# Altium PCB mbed_programmer.PcbDoc
Units mm, origin at the board's own origin, x right, y up, seen from the top; angles counter-clockwise.
Board outline 42 x 26.5 mm, 2 copper layers (Top Layer, Bottom Layer); 32 components, 46 nets, 153 pads, 95 vias.
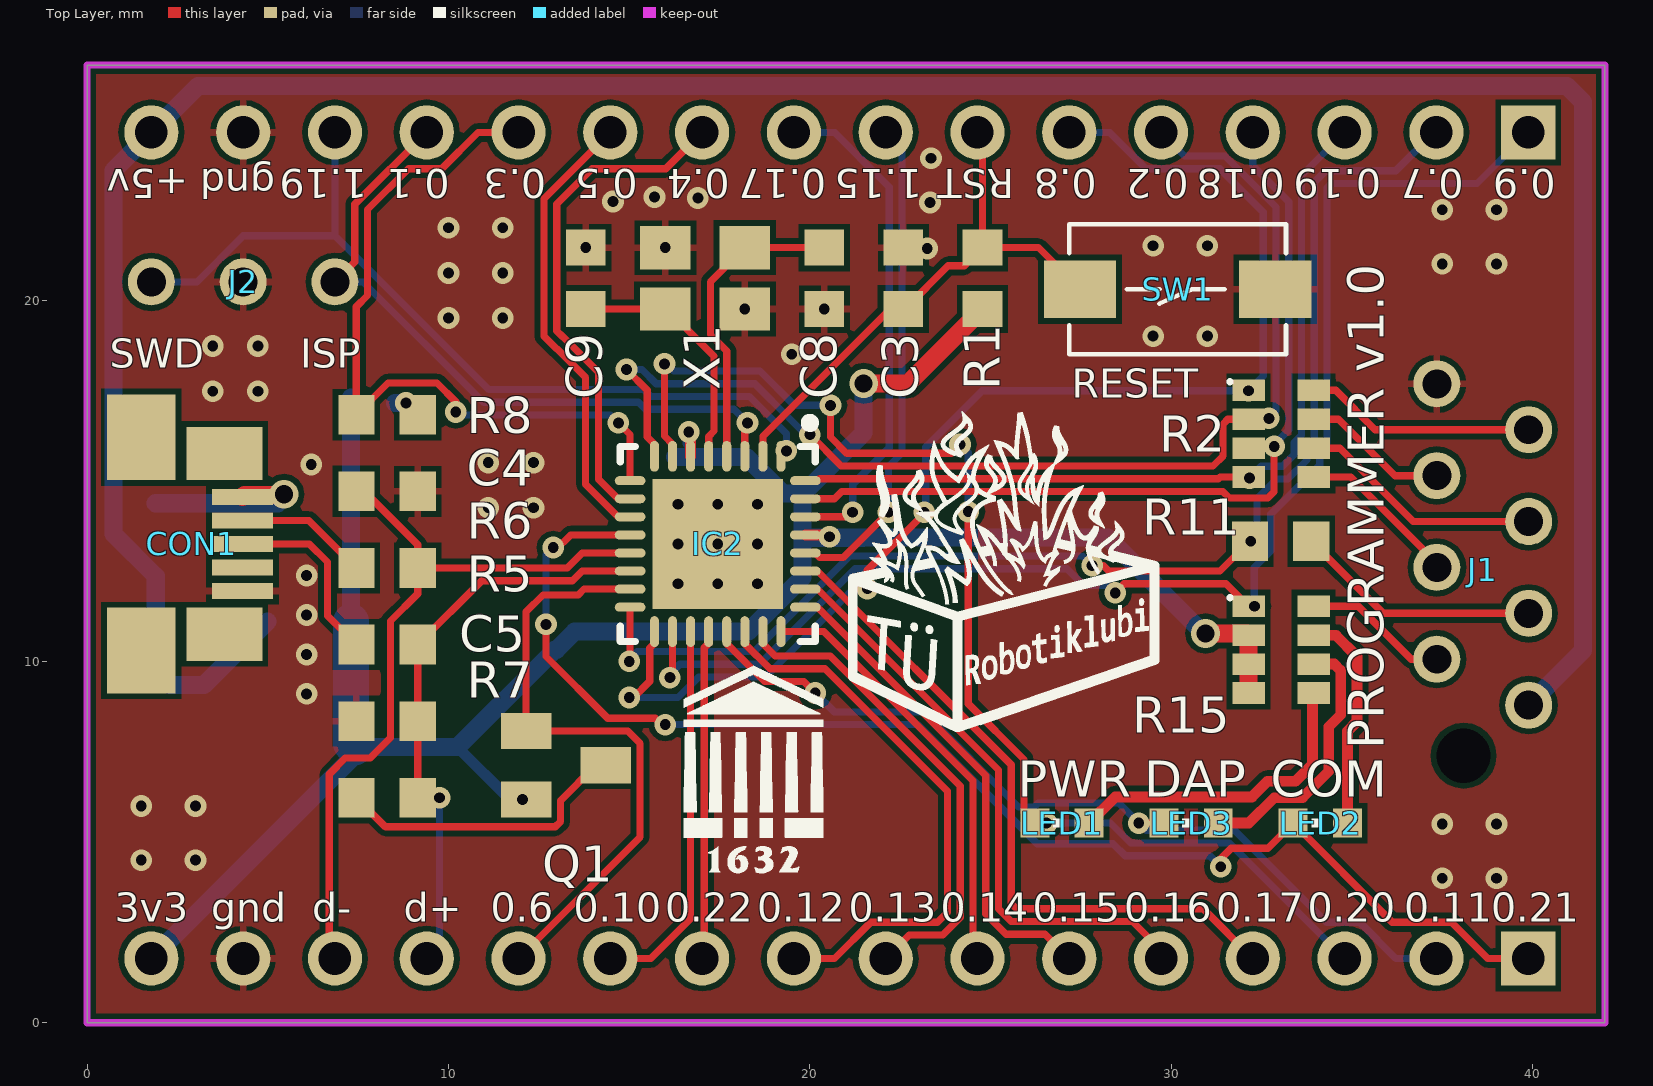
[diagram p0: Top Layer view]
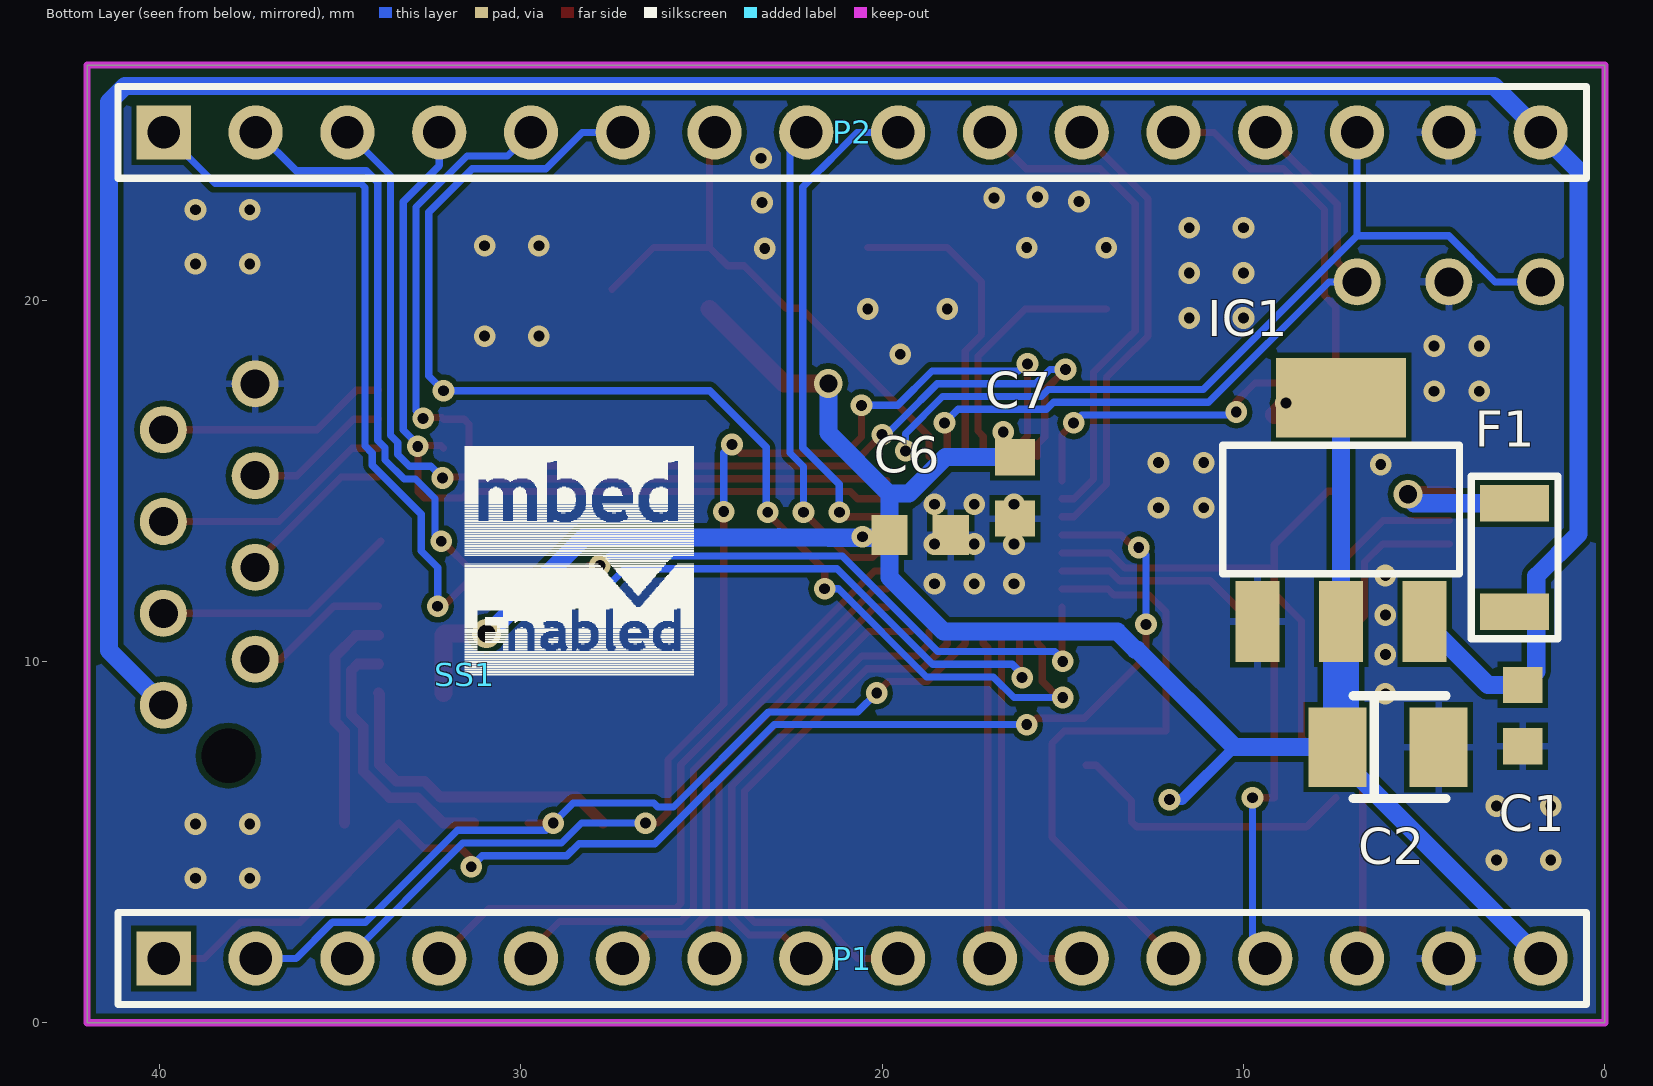
[diagram p1: Bottom Layer view, seen from below]

## Layer stack, top to bottom
Top Solder: solder mask 0.0102, Solder Resist, Dk 3.5
Top Layer: signal copper 0.0356
Dielectric1: dielectric 0.32, FR-4, Dk 4.8
Bottom Layer: signal copper 0.0356
Bottom Solder: solder mask 0.0102, Solder Resist, Dk 3.5

## Board outline
0,0 0,26.5 42,26.5 42,0

## Design rules (kind name [scope] priority, off if disabled: settings)
BoardOutlineClearance [All] p1: gap=0.2
Clearance [All] p1: gap=0.153
ComponentClearance [All] p1: gap=0.1 collisioncheckmode=3 verticalgap=0.1 showdistances=FALSE
FabricationTestPointUsage TestPointUsage [All] p1: valid=0 allowmultiple=FALSE
FabricationTestpoint Testpoint [All] p1: side=3 testpointundercomponent=TRUE minsize=1.016 maxsize=2.54 preferedsize=1.524 minholesize=0 maxholesize=1.016 preferedholesize=0.813 testpointgrid=0.025 allowsidetop=TRUE allowsidebottom=TRUE usegrid=TRUE gridtolerance=0
HoleSize [All] p1: absolutevalues=TRUE maxlimit=2.54 minlimit=0.3 maxpercent=80.000 minpercent=20.000
MinimumAnnularRing [All] p1: minimumring=0.15
PlaneConnect [All] p1: planeconnectstyle=Relief reliefexpansion=0.2 reliefentries=4 reliefconductorwidth=0.2 reliefairgap=0.15
PolygonConnect PolygonConnect_Vias [All vs IsVia] p1: connectstyle=Direct reliefconductorwidth=0.254 reliefentries=4 polygonreliefangle="90 Angle" airgapwidth=0.254
PolygonConnect [All] p2: connectstyle=Relief reliefconductorwidth=0.2 reliefentries=4 polygonreliefangle="90 Angle" airgapwidth=0.15
RoutingVias [All] p1: holewidth=0.4 width=0.7 viastyle="Through Hole" minholewidth=0.3 minwidth=0.6 maxholewidth=6.3 maxwidth=1.5
SilkToSilkClearance [All] p1: silktosilkclearance=0.2
SilkToSolderMaskClearance SilkscreenOverComponentPads [IsPad] p1: minsilkscreentomaskgap=0.254 clearancetoexposedcopper=TRUE
SolderMaskExpansion [All] p1: expansion=0.075
Width [All] p1: maxlimit=1 minlimit=0.152 preferedwidth=0.2 minimp=50.000000 maximp=50.000000 favimp=50.000000
23 further rules are at their usual default settings.

## Components (designator, comment, footprint, x,y, rotation, side; value= is the part's Value field where it differs from the comment)
C1 "100nF" 0603 2.275,8.5 r270 bottom
C2 "10uF" CASE-B 6,7.625 r180 bottom
C3 "100nF" 0603 22.587,20.6 r90 top
C4 "18pF" 0603 8.3,14.705 r0 top
C5 "18pF" 0603 8.3,8.345 r180 top
C6 "100nF" 0603 18.95,13.5 r180 bottom
C7 "100nF" 0603 16.325,14.8 r270 bottom
C8 "18pF" 0603 20.4,20.6 r270 top
C9 "18pF" 0603 13.8,20.6 r90 top
CON1 "USB Connectors" MOLEX-47364-0001 1.5,13.25 r0 top
F1 "PTC-1206" PTC-1206 2.5,12.875 r270 bottom
IC1 "LD1117S33" SOT223 7.3,14.201 r180 bottom
IC2 "IF-LPC11U35" QFN50P500X500X85_HS-33N 17.45,13.25 r270 top
J1 "HEADER-8" MICRO-MATCH-8 39.89,8.79 r270 top
J2 "HEADER-3" PIN-HEADER-3 6.858,20.5 r180 top
LED1 "PWR" CHIPLED_0603 26.975,5.525 r90 top
LED2 "COM" CHIPLED_0603 34.125,5.525 r90 top
LED3 "DAP" CHIPLED_0603 30.55,5.525 r90 top
P1 "Header 16" HDR1X16 39.878,1.778 r180 bottom
P2 "Header 16" HDR1X16 39.878,24.638 r180 bottom
Q1 "BSS84" SOT23 13.25,7.125 r270 top
R1 "10k" 0603 24.775,20.6 r270 top
R2 "470R" CAC-80P319X159-8N 33.039,16.3 r0 top
R5 "33R" 0603 8.3,10.465 r0 top
R6 "33R" 0603 8.3,12.585 r0 top
R7 "1k5" 0603 8.3,6.225 r0 top
R8 "10k" 0603 8.3,16.825 r0 top
R11 "470R" 0603 33.025,13.325 r180 top
R15 "470R" CAC-80P319X159-8N 33.039,10.325 r0 top
SS1 "MBED-ENABLED-LOGOSMALL" MBED-ENABLED-LOGO-250X250-MIL 31.55,9.625 r180 bottom
SW1 "RESET" DTSM-32S-B 30.175,20.3 r180 top
X1 "ABM8G" XTAL-3.2x2.5 17.1,20.6 r180 top

## Footprints (in the part's own frame and the unit in brackets; to place one, negate y for a bottom-side part, rotate by r counter-clockwise, add the part's x,y. Pads: shape width x height; smd on the part's side, far side on the other; paste and mask are expansions set on the pad)
0603 [mm]
  rect 1x1.1 smd: 1(-0.85,0) 2(0.85,0)
CAC-80P319X159-8N [mm] "Chip Array, ConvexE, 8-Leads, Pitch 0,80mm,  Body 3,20x1,60mm,  IPC Medium Density"
  rect 0.9x0.6 smd: 1(-0.9,1.2) 2(-0.9,0.4) 3(-0.9,-0.4) 4(-0.9,-1.2) 5(0.9,-1.2) 6(0.9,-0.4) 7(0.9,0.4) 8(0.9,1.2)
  silkscreen extent -1.46,1.39 -1.36,1.49, body extent -0.92,-1.68 0.92,1.68, height 0.7
CASE-B [mm]
  rect 1.6x2.2 smd: 1(-1.4,0) 2(1.4,0)
  silkscreen extent -0.96,-1.42 1.6,1.42
CHIPLED_0603 [mil]
  rect 31.5x31.5 smd: A(0,-29.53) C(0,29.53)
  silkscreen extent -5,0 5,10
DTSM-32S-B [mm]
  rect 2x1.6 smd: P$1(-2.7,0) P$2(2.7,0)
  silkscreen extent -3,-1.8 3,1.8
HDR1X16 [mm] "Connector; Header; 16 Position"
  rect 1.5x1.5 hole 0.9: 1(0,0)
  round 1.5 hole 0.9: 2(2.54,0) 3(5.08,0) 4(7.62,0) 5(10.16,0) 6(12.7,0) 7(15.24,0) 8(17.78,0) 9(20.32,0) 10(22.86,0) 11(25.4,0) 12(27.94,0) 13(30.48,0) 14(33.02,0) 15(35.56,0) 16(38.1,0)
  silkscreen extent -1.27,-1.27 39.37,1.27
MBED-ENABLED-LOGO-250X250-MIL [mm]
  silkscreen extent -0.01,-0.01 6.34,6.34
MICRO-MATCH-8 [mm]
  round 1.3 hole 0.8: 1(0,0) 2(-1.27,-2.54) 3(-2.54,0) 4(-3.81,-2.54) 5(-5.08,0) 6(-6.35,-2.54) 7(-7.62,0) 8(-8.89,-2.54)
  round 0 hole 1.5 unplated: drill(1.4,-1.8)
  body extent -10.49,-3.77 1.6,1.23, height 4
MOLEX-47364-0001 [mm]
  rect 1.7x0.45 smd: 4(2.8,-0.65) D+(2.8,0) D-(2.8,0.65) GND(2.8,-1.3) VBUS(2.8,1.3)
  rect 1.9x2.375 smd: GND1(0,2.95) GND4(0,-2.95)
  rect 2.1x1.475 smd: GND2(2.3,2.5) GND3(2.3,-2.5)
  body extent -2.78,-3.99 2.65,3.99, height 2.72
PIN-HEADER-3 [mm]
  round 1.3 hole 0.8: 1(0,0) 2(2.54,0) 3(5.08,0)
PTC-1206 [mm]
  rect 1x1.9 smd: 1(-1.5,0) 2(1.5,0)
  silkscreen extent -2.25,-1.2 2.25,1.2
QFN50P500X500X85_HS-33N [mm] "QFN, 32-Leads, Body 5,00x5,00mm, Pitch 0,50mm, Thermal Pad 3,60x3,60mm, IPC Medium Density"
  oval 0.85x0.25 smd: 1(-2.425,1.75) 2(-2.425,1.25) 3(-2.425,0.75) 4(-2.425,0.25) 5(-2.425,-0.25) 6(-2.425,-0.75) 7(-2.425,-1.25) 8(-2.425,-1.75) 17(2.425,-1.75) 18(2.425,-1.25) 19(2.425,-0.75) 20(2.425,-0.25) 21(2.425,0.25) 22(2.425,0.75) 23(2.425,1.25) 24(2.425,1.75)
  oval 0.25x0.85 smd: 9(-1.75,-2.425) 10(-1.25,-2.425) 11(-0.75,-2.425) 12(-0.25,-2.425) 13(0.25,-2.425) 14(0.75,-2.425) 15(1.25,-2.425) 16(1.75,-2.425) 25(1.75,2.425) 26(1.25,2.425) 27(0.75,2.425) 28(0.25,2.425) 29(-0.25,2.425) 30(-0.75,2.425) 31(-1.25,2.425) 32(-1.75,2.425)
  rect 3.6x3.6 smd: EXP(0,0)
  silkscreen extent -3.47,-2.7 2.7,2.7, body extent -2.6,-2.6 2.6,2.6, height 0.85
SOT23 [mm]
  rect 1x1.4 smd: 1(-0.95,-1.1) 2(0.95,-1.1) 3(0,1.1)
SOT223 [mil]
  rect 48x88 smd: 1(-91,-122) 2(0,-122) 3(91,-122)
  rect 141.73x86.61 smd: 4(0,122.01)
  silkscreen extent -129,-70 129,70
XTAL-3.2x2.5 [mm] "3.2mm x 2.5mm SMD Crystal Oscillator"
  rect 1.4x1.2 smd: 0(-1.1,-0.85) 1(1.1,-0.85) 2(1.1,0.85) 3(-1.1,0.85)
  body extent -1.6,-1.25 1.6,1.25, height 1

## Part data
C1 C3 C4 C5 C6 C7 C8 C9: library part C0603
C2: library part C-POLB
CON1: library part USB_MICROB
LED1 LED2 LED3: library part LED0603
P1 P2: "Header, 16-Pin"
R1 R5 R6 R7 R8 R11: library part R0603
R2 R15: library part 0603x4_resistor_array
SW1: library part SPST

## Via types
v1: diameter 0.6, hole 0.3, Top Layer to Bottom Layer, 92 vias
v2: diameter 0.8, hole 0.5, Top Layer to Bottom Layer, 3 vias

## Nets (pads, with @x,y where several pads share a name; then routed paths per layer and width w, separated by ;. In a path a pad name is that pad's centre, name@x,y a point inside that pad or via, vN(x,y) a via of type N, cw(c..) or ccw(c..) an arc to the next point about the centre after c; other vN are vias at no path point)
+3.3V_IF: C2.1 C6.1 C7.1 IC1.2 IC1.4 IC2.6 IC2.29 P1.16 Q1.2 R1.2 R8.2 R15.2 R15.3 R15.4 | length 66.8
  Top Layer w0.3: v1(12.05,6.175) Q1.2 ; v1(16.647,16.345) 16.7,16.292 IC2.6 ; IC2.29 20.492,13.5 v1(20.545,13.447)
  Top Layer w0.5: v1(8.825,17.15) R8.2 ; v2(21.49,17.695) 22.72,17.695 R1.2 ; v2(30.95,10.775) 32.089,10.775 R15.2 R15.3 R15.4
  Bottom Layer w0.3: 10.25,7.625 11.7,6.175 v1(12.05,6.175) ; C7.1@16.628,16.025 16.628,16.326 v1(16.647,16.345) ; v1@20.3,13.525 20.378,13.447 v1(20.545,13.447)
  Bottom Layer w0.5: P1.16 7.4,7.4 C2.1 10.25,7.625 12.947,10.322 12.991,10.322 13.494,10.825 18.3,10.825 19.8,12.325 C6.1 ; IC1.2 IC1.4 ; IC1.4@8.525,17.15 v1(8.825,17.15) ; C7.1@16.275,15.65 18.244,15.65 19.253,14.641 19.816,14.641 ; 21.476,13.422 20.772,13.422 19.878,13.422 C6.1 ; 21.476,13.423 22.845,13.423 22.859,13.437 22.874,13.423 28.252,13.423 30.925,10.75 v2(30.95,10.775) ; v2(21.49,17.695) 21.49,16.315 19.816,14.641 ; C6.1 19.8,14.625 19.816,14.641
  Bottom Layer w1: IC1.2 7.3,7.725 C2.1
AD1: IC2.22 P1.9 | length 15.8
  Top Layer w0.2: IC2.22 18.2,10.49 18.896,9.794 20.42,9.794 23.807,6.407 23.807,3.057 23.531,2.781 21.683,2.781 20.68,1.778 P1.9
AD2: IC2.23 P1.8 | length 13.6
  Top Layer w0.2: IC2.23 18.7,10.49 19.043,10.147 20.566,10.147 24.16,6.553 24.16,2.911 23.677,2.428 22.748,2.428 P1.8
AD3: IC2.24 P1.7 | length 12
  Top Layer w0.2: IC2.24 20.387,10.825 24.513,6.699 24.513,1.903 P1.7
AD4: IC2.25 P1.6 | length 13.6
  Top Layer w0.2: IC2.25 20.211,11.5 24.866,6.845 24.866,3.009 25.428,2.447 26.509,2.447 P1.6
AD5: IC2.26 P1.5 | length 16.5
  Top Layer w0.2: IC2.26 20.21,12 25.219,6.992 25.219,3.155 25.574,2.8 28.925,2.8 29.718,2.007 P1.5
AD6: IC2.20 P1.10 | length 9.2
  Top Layer w0.2: P1.10 17.078,1.778 17.078,10.378 17.2,10.5 IC2.20
AD7: IC2.27 P1.4 | length 19.1
  Top Layer w0.2: IC2.27 20.21,12.5 25.572,7.138 25.572,3.302 25.72,3.153 30.883,3.153 P1.4
D+: CON1.D+ R5.1 | length 5.2
  Top Layer w0.2: CON1.D+ 4.303,13.247 6.147,13.247 6.15,13.25 6.65,12.75 6.65,11.265 R5.1
D-: CON1.D- R6.1 | length 3.7
  Top Layer w0.2: CON1.D- 6.135,13.9 R6.1
DCD: IC2.28 P2.8 | length 13.7
  Top Layer w0.2: IC2.28 20.148,13 20.27,12.878 20.927,12.878 v1(22.175,14.126)
  Bottom Layer w0.2: P2.8 22.548,24.188 22.548,15.768 22.175,15.395 v1(22.175,14.126)
GND: C1.2 C2.2 C3.2 C4.2 C5.2 C6.2 C7.2 C8.2 C9.2 CON1.GND IC1.1 IC2.EXP J1.8 J2.2 P1.15 P2.15 SW1.P$1 X1.1 X1.3
  other v1: 37.5,4 39,4 1.5,4.5 3,4.5 37.5,5.5 39,5.5 1.5,6 3,6 6.075,9.1 6.075,10.192 6.075,11.283 16.35,12.15 17.45,12.15 18.55,12.15 6.075,12.375 16.35,13.25 17.45,13.25 18.55,13.25 11.1,14.25 12.35,14.25 16.35,14.35 17.45,14.35 18.55,14.35 6.2,15.45 11.1,15.5 12.35,15.5 3.475,17.475 4.725,17.475 19.5,18.5 3.475,18.725 4.725,18.725 29.5,19 31,19 10,19.5 11.5,19.5 18.2,19.75 20.4,19.75 10,20.75 11.5,20.75 37.5,21 39,21 23.25,21.425 13.8,21.45 16,21.45 29.5,21.5 31,21.5 10,22 11.5,22 37.5,22.5 39,22.5 23.325,22.7 14.55,22.725 16.9,22.825 15.7,22.85 23.35,23.925
HID: IC2.12 LED2.C P1.1 | length 37.4
  Top Layer w0.2: v1(12.7,11.025) 12.7,10.135 14.407,8.428 15.723,8.428 16,8.151 v1(16,8.25) ; v1(12.901,13.151) 12.901,13.118 12.95,13.068 13.382,13.5 IC2.12 ; v1(31.369,4.318) 31.369,4.537 31.658,4.826 32.676,4.826 LED2.C 36.119,2.781 37.753,2.781 38.756,1.778 P1.1
  Bottom Layer w0.2: v1(12.7,11.025) 12.7,12.95 v1(12.901,13.151) ; v1(16,8.25) 22.992,8.25 26.289,4.953 28.391,4.953 28.725,4.619 31.068,4.619 v1(31.369,4.318)
MSD: IC2.7 LED1.C P1.3 | length 34
  Top Layer w0.2: v1(15.975,18.234) 15.975,16.235 16.2,16.01 IC2.7 ; v1(20.57,17.085) 20.57,16.206 21.014,15.762 23.917,15.762 v1(24.155,16) ; v1(24.385,14.145) 24.384,14.144 24.384,8.825 25.925,7.284 25.925,5.825 LED1.C v1(26.55,5.525)
  Bottom Layer w0.2: v1(15.975,18.234) 16.003,18.262 16.231,18.034 18.622,18.034 19.57,17.085 v1(20.57,17.085) ; v1(24.155,16) 24.384,15.771 v1(24.385,14.145) v1(24.385,14.145) ; v1(26.55,5.525) 28.318,5.525 28.871,4.972 31.604,4.972 P1.3
NetC8_1: C8.1 IC2.4 X1.0 | length 8.6
  Top Layer w0.2: IC2.4 17.7,18.592 17.247,19.045 17.247,20.497 X1.0 C8.1
NetC9_1: C9.1 IC2.5 X1.2 | length 6.9
  Top Layer w0.2: C9.1 16.043,19.75 17.347,18.446 17.347,16.372 17.2,16.225 IC2.5
NetCON1_VBUS: CON1.VBUS F1.1 | length 4.9
  Top Layer w0.5: CON1.VBUS 4.36,14.61 5.434,14.61 v2(5.45,14.626)
  Bottom Layer w0.5: F1.1@1.9,14.375 F1.1 5.276,14.375 5.45,14.55 v2(5.45,14.626)
NetLED1_A: LED1.A R15.5 | length 8.8
  Top Layer w0.3: LED1.A 28.45,6.25 32.231,6.25 32.662,6.681 33.44,6.681 33.907,7.148 33.907,9.093 R15.5
NetLED2_A: LED2.A R15.7 | length 6.2
  Top Layer w0.3: R15.7 34.555,10.725 35.145,10.135 35.145,8.334 34.875,8.064 LED2.A
NetLED3_A: LED3.A R15.6 | length 7.4
  Top Layer w0.3: LED3.A 32.146,5.525 32.849,6.228 33.628,6.228 34.36,6.96 34.36,8.19 34.692,8.522 34.692,9.743 34.51,9.925 R15.6
NetQ1_3: Q1.3 R7.1 | length 8.3
  Top Layer w0.2: R7.1 8.253,5.422 9.755,5.422 9.758,5.425 11.342,5.425 11.345,5.422 12.955,5.422 13.103,5.57 13.103,6.153 14.075,7.125 Q1.3
RESET: C3.1 IC2.2 P2.7 R1.1 SW1.P$2 | length 15.2
  Top Layer w0.2: IC2.2 18.7,16.231 22.244,19.775 22.65,19.775 23.825,20.95 24.275,20.95 R1.1 ; P2.7 24.775,24.501 R1.1 ; SW1.P$2 26.325,21.45 R1.1
RTS: IC2.30 P2.9 | length 14.1
  Top Layer w0.2: IC2.30 21.059,14 v1(21.184,14.126)
  Bottom Layer w0.2: P2.9 20.687,24.638 21.095,24.23 21.095,24.223 21.683,23.635 21.69,23.635 22.195,23.13 22.195,15.914 21.184,14.904 v1(21.184,14.126)
SCK0: IC2.19 P1.11 | length 10.6
  Top Layer w0.2: P1.11 15.6,1.778 16.7,2.878 IC2.19
SCL: IC2.10 P2.10 | length 14
  Top Layer w0.2: IC2.10 14.69,14.5 14.148,15.043 14.148,18.002 13.153,18.997 13.145,18.997 12.997,19.145 12.997,22.658 13.974,23.635 16.015,23.635 P2.10
SDA: IC2.11 P2.11 | length 13.1
  Top Layer w0.2: P2.11@14.478,24.153 P2.11 12.644,22.804 12.644,18.999 12.999,18.644 13.007,18.644 13.795,17.856 13.795,14.896 14.69,14 IC2.11
SWDAP: IC2.1 J2.3 P2.14 | length 23.9
  Top Layer w0.2: IC2.1 v1(19.35,15.825)
  Bottom Layer w0.2: J2.3 3.041,20.5 4.318,21.777 6.858,21.777 ; P2.14 6.858,21.777 ; v1(19.35,15.825) 19.35,16.307 18.329,17.328 15.6,17.328 15.406,17.522 11.113,17.522 6.858,21.777
TGT_NRESET: IC2.8 P2.5 R2.2 | length 32.7
  Top Layer w0.2: v1(14.925,18.075) 15.5,17.5 15.5,16.21 15.7,16.01 IC2.8 ; v1(20.001,16.276) 20.868,15.409 31.159,15.409 31.436,15.686 31.436,16.571 31.565,16.7 R2.2 32.188,16.749 32.725,16.749 v1(32.702,16.726)
  Bottom Layer w0.2: v1(14.925,18.075) 15.352,18.075 15.746,17.681 18.475,17.681 19.424,16.732 19.738,16.418 19.88,16.276 v1(20.001,16.276) ; P2.5 30.368,23.988 31.49,23.988 32.902,22.576 32.902,16.926 v1(32.702,16.726)
TGT_NRESET1: J1.6 R2.7 | length 4.1
  Top Layer w0.2: R2.7 34.63,16.7 36.19,15.14 J1.6
TGT_RX: IC2.32 P2.3 R2.4 | length 23.3
  Top Layer w0.2: IC2.32 20.21,15 20.266,15.056 31.305,15.056 31.349,15.1 R2.4 v1(32.164,15.075)
  Bottom Layer w0.2: v1(32.164,15.075) 32.487,15.398 33.081,15.398 33.405,15.722 33.405,16.055 33.608,16.258 33.608,23.448 P2.3
TGT_RX1: J1.4 R2.5 | length 4.5
  Top Layer w0.2: R2.5 34.971,15.1 37.35,12.721 J1.4
TGT_SWCLK: IC2.16 P2.2 R11.2 | length 35.3
  Top Layer w0.2: v1(15,10) 15,10.05 15.025,10.075 IC2.16 ; v1(27.81,12.655) 28.116,12.655 28.272,12.499 31.349,12.499 R11.2 v1(32.2,13.325)
  Bottom Layer w0.2: v1(15,10) 15,10.05 15.225,10.275 18.461,10.275 21.105,12.919 21.752,12.919 27.546,12.919 v1(27.81,12.655) ; v1(32.2,13.325) 32.375,13.5 32.375,14.504 32.916,15.045 33.227,15.045 33.758,15.576 33.758,15.909 33.961,16.112 33.961,23.261 34.275,23.575 36.216,23.575 37.279,24.638 P2.2
TGT_SWCLK1: J1.3 R11.1 | length 6.8
  Top Layer w0.2: R11.1 35.87,11.33 J1.3
TGT_SWDIO: IC2.17 P2.6 R2.1 | length 35.6
  Top Layer w0.2: v1(15,9) 15.124,9 15.572,9.448 15.572,10.372 15.7,10.5 IC2.17 ; v1(21.59,12.008) 21.59,12.52 v1@23.205,14.135 ; v1(32.139,17.489) R2.1
  Bottom Layer w0.2: v1(15,9) 15.075,9 15.077,8.998 16.354,8.998 16.925,9.569 18.769,9.569 21.208,12.008 v1(21.59,12.008) ; v1@23.205,14.135 23.205,15.926 24.768,17.489 v1(32.139,17.489) 32.549,17.899 32.549,22.43 31.343,23.635 29.303,23.635 28.3,24.638 P2.6
  other v1: 23.165,14.126
TGT_SWDIO1: J1.7 R2.8 | length 6.4
  Top Layer w0.2: R2.8 34.55,17.5 35.64,16.41 J1.7
TGT_SWO: IC2.18 P2.1 R15.1 | length 38.6
  Top Layer w0.2: v1(16.125,9.551) 16.2,9.626 IC2.18 ; v1(28.45,11.895) 28.701,12.146 31.518,12.146 R15.1 v1(32.3,11.525)
  Bottom Layer w0.2: v1(16.125,9.551) 16.125,9.65 16.397,9.922 18.608,9.922 21.252,12.566 27.117,12.566 27.581,12.102 28.243,12.102 v1(28.45,11.895) ; v1(32.3,11.525) 32.3,12.6 32.753,13.053 32.753,14.072 34.111,15.429 34.111,15.763 34.314,15.966 34.314,23.114 34.421,23.222 38.462,23.222 P2.1 P2.1@39.878,24.078
TGT_SWO1: J1.2 R15.8 | length 4
  Top Layer w0.2: R15.8 35.176,11.525 36.641,10.06 J1.2
TGT_TX: IC2.31 P2.4 R2.3 | length 24.2
  Top Layer w0.2: IC2.31 20.68,14.5 20.883,14.703 31.428,14.703 31.609,14.522 32.669,14.522 32.842,14.695 v1@32.842,15.653 ; R2.3 32.212,15.973 32.852,15.973 v1(32.852,15.951)
  Bottom Layer w0.2: P2.4 32.258,23.719 33.255,22.722 33.255,16.405 32.852,16.002 v1(32.852,15.951)
TGT_TX1: J1.5 R2.6 | length 6.8
  Top Layer w0.2: R2.6 34.67,15.9 36.7,13.87 J1.5
U_D+: C5.1 IC2.14 P1.13 R5.2 R7.2 | length 16.2
  Top Layer w0.2: v1(9.75,6.225) R7.2 C5.1 R5.2 10.917,12.232 13.431,12.232 13.699,12.5 IC2.14
  Bottom Layer w0.2: P1.13 9.75,2.13 v1(9.75,6.225)
U_D-: C4.1 IC2.13 P1.14 R6.2 | length 21.4
  Top Layer w0.2: P1.14 6.697,1.778 6.697,6.88 7.142,7.325 7.838,7.325 8.397,7.884 8.397,11.12 9.15,11.873 R6.2 ; C4.1 7.67,14.705 9.15,13.225 R6.2 ; IC2.13 13.7,13 13.285,12.585 R6.2
UART: IC2.21 LED3.C P1.2 | length 24.4
  Top Layer w0.2: IC2.21 17.7,10.491 17.822,10.369 18.043,10.147 18.75,9.441 19.834,9.441 v1(20.15,9.125) ; v1(29.1,5.525) LED3.C
  Bottom Layer w0.2: v1(20.15,9.125) 20.672,8.603 23.138,8.603 25.772,5.969 26.212,5.969 26.321,6.078 28.547,6.078 v1(29.1,5.525) 29.3,5.325 31.75,5.325 34.294,2.781 35.213,2.781 36.216,1.778 P1.2
USB_SCON: IC2.15 P1.12 Q1.1 | length 17.1
  Top Layer w0.2: P1.12 15.303,5.143 15.303,7.73 14.958,8.075 Q1.1 12.147,8.078 12.147,11.372 12.613,11.838 13.588,11.838 13.75,12 IC2.15
USB_VBUS: IC2.9 P2.12 R8.1 | length 21
  Top Layer w0.2: v1(10.2,16.9) 10.2,17.183 9.68,17.703 8.328,17.703 R8.1 7.45,19.815 7.761,20.126 7.761,22.502 8.894,23.635 9.813,23.635 10.816,24.638 P2.12 ; v1(14.701,16.601) 15.025,16.277 IC2.9
  Bottom Layer w0.2: v1(10.2,16.9) 10.225,16.9 10.141,16.816 14.486,16.816 v1(14.701,16.601)
USBISP: IC2.3 J2.1 P2.13 | length 19.2
  Top Layer w0.2: J2.1 7.408,21.05 7.408,22.648 P2.13 ; IC2.3 18.2,16.525 v1(18.275,16.6)
  Bottom Layer w0.2: J2.1 7.636,20.5 10.967,17.169 15.259,17.169 15.454,16.975 17.9,16.975 v1(18.275,16.6)
VBUS_IF: C1.1 F1.2 IC1.3 J1.1 P2.16 | length 77.5
  Bottom Layer w0.5: IC1.3 3.236,9.35 C1.1 1.9,9.725 1.9,12.355 0.725,13.53 0.725,23.585 P2.16 3.065,25.925 40.95,25.925 41.4,25.475 41.4,10.3 J1.1
pads on no net: CON1.4 CON1.GND1 CON1.GND2 CON1.GND3 CON1.GND4 J1.drill

## Polygon pours and split planes (outlines as drawn)
GND on Bottom Layer "Bottom-GND" (solid, remove dead copper, pour order 2): 0,26.5 42,26.5 42,0 0,0
GND on Top Layer "Top-GND" (solid, remove dead copper, pour order 0): 42,0 42,26.5 0,26.5 0,0

## Keep-outs
Keep-Out Layer:
  the board outline again, w0.2

## Silkscreen, mask and mechanical layers (free items; w line width, h text height)
Top Overlay:
  drawing of 40 lines, arcs and shapes, not listed
  text "+5v" at 2.794,23.622 h0.8 r180
  text "gnd" at 5.207,23.622 h0.8 r180
  text "1.19" at 7.747,23.622 h0.8 r180
  text "0.1" at 10.033,23.622 h0.8 r180
  text "0.3" at 12.7,23.622 h0.8 r180
  text "0.5" at 15.24,23.622 h0.8 r180
  text "0.4" at 17.78,23.622 h0.8 r180
  text "0.17" at 20.447,23.622 h0.8 r180
  text "1.15" at 23.114,23.622 h0.8 r180
  text "RST" at 25.654,23.622 h0.8 r180
  text "0.8" at 27.94,23.622 h0.8 r180
  text "0.2" at 30.48,23.622 h0.8 r180
  text "0.18" at 33.147,23.622 h0.8 r180
  text "0.19" at 35.814,23.622 h0.8 r180
  text "0.7" at 38.1,23.622 h0.8 r180
  text "0.9" at 40.64,23.622 h0.8 r180
  text "SWD" at 0.625,18.125 h0.8
  text "ISP" at 5.9,18.125 h0.8
  text "PROGRAMMER v1.0" at 35.875,7.575 h1 r90
  text "3v3" at 0.762,2.794 h0.8
  text "gnd" at 3.429,2.794 h0.8
  text "d-" at 6.223,2.794 h0.8
  text "d+" at 8.763,2.794 h0.8
  text "0.6" at 11.176,2.794 h0.8
  text "0.10" at 13.462,2.794 h0.8
  text "0.22" at 16.002,2.794 h0.8
  text "0.12" at 18.542,2.794 h0.8
  text "0.13" at 21.082,2.794 h0.8
  text "0.14" at 23.622,2.794 h0.8
  text "0.15" at 26.162,2.794 h0.8
  text "0.16" at 28.702,2.794 h0.8
  text "0.17" at 31.242,2.794 h0.8
  text "0.20" at 33.782,2.794 h0.8
  text "0.11" at 36.449,2.794 h0.8
  text "0.21" at 38.862,2.794 h0.8
Mechanical 16:
  drawing of 1874 lines, arcs and shapes, not listed
  text "1" at -89.286,101.509 h1.78
  text "2" at -16.642,101.509 h1.78
  text "3" at 56.51,101.509 h1.78
  text "4" at 129.408,101.509 h1.78
  text "A" at -123.627,78.497 h1.78
  text "A" at 163.393,78.497 h1.78
  text "B" at 163.25,33.75 h1.78
  text "B" at -123.627,30.44 h1.78
  text "C" at -123.627,-18.074 h1.78
  text "C" at 163.393,-18.074 h1.78
  text "ENGINEER:" at 48.458,-55.082 h1.14
  text "TITLE:" at 86.558,-55.082 h1.14
  text "PCB DESIGNER:" at 48.458,-62.575 h1.14
  text "D" at -123.627,-66.08 h1.78
  text "D" at 163.393,-66.08 h1.78
  text "DATE:" at 48.458,-70.322 h1.14
  text "PART NO.:" at 86.558,-70.322 h1.14
  text "REV:" at 139.898,-70.322 h1.14
  text "Altium Limited" at 15.438,-72.862 h1.78
  text ".PRINT_DATE" at 49.728,-73.37 h1.78
  text "12a Rodborough Rd" at 15.438,-75.402 h1.78
  text "Frenchs Forest" at 15.438,-77.942 h1.78
  text "FILE NAME:" at 48.458,-77.942 h1.14
  text "DWG NO:" at 86.558,-77.942 h1.14
  text "SCALE:" at 139.898,-77.942 h1.14
  text "NSW 2086" at 15.438,-80.482 h1.78
  text ".PCB_FILE_NAME_NO_PATH" at 49.728,-80.99 h1.78
  text "1" at -89.286,-86.451 h1.78
  text "2" at -16.642,-86.451 h1.78
  text "3" at 56.51,-86.451 h1.78
  text "4" at 129.408,-86.451 h1.78